# Altium PCB DaughterBoards.PcbDoc (part 4 of 4)
Units mil, origin at the board's own origin, x right, y up, seen from the top; angles counter-clockwise.
Board outline 8080.87 x 6506.06 mil, 4 copper layers (Top Layer, Top, Mid-Layer 1, GND, Mid-Layer 2, VCC, Bottom Layer, Bottom), stack 18.2 mil thick; 508 components, 296 nets, 1635 pads, 376 vias.
Unrouted connection lines stored in the file: 28.
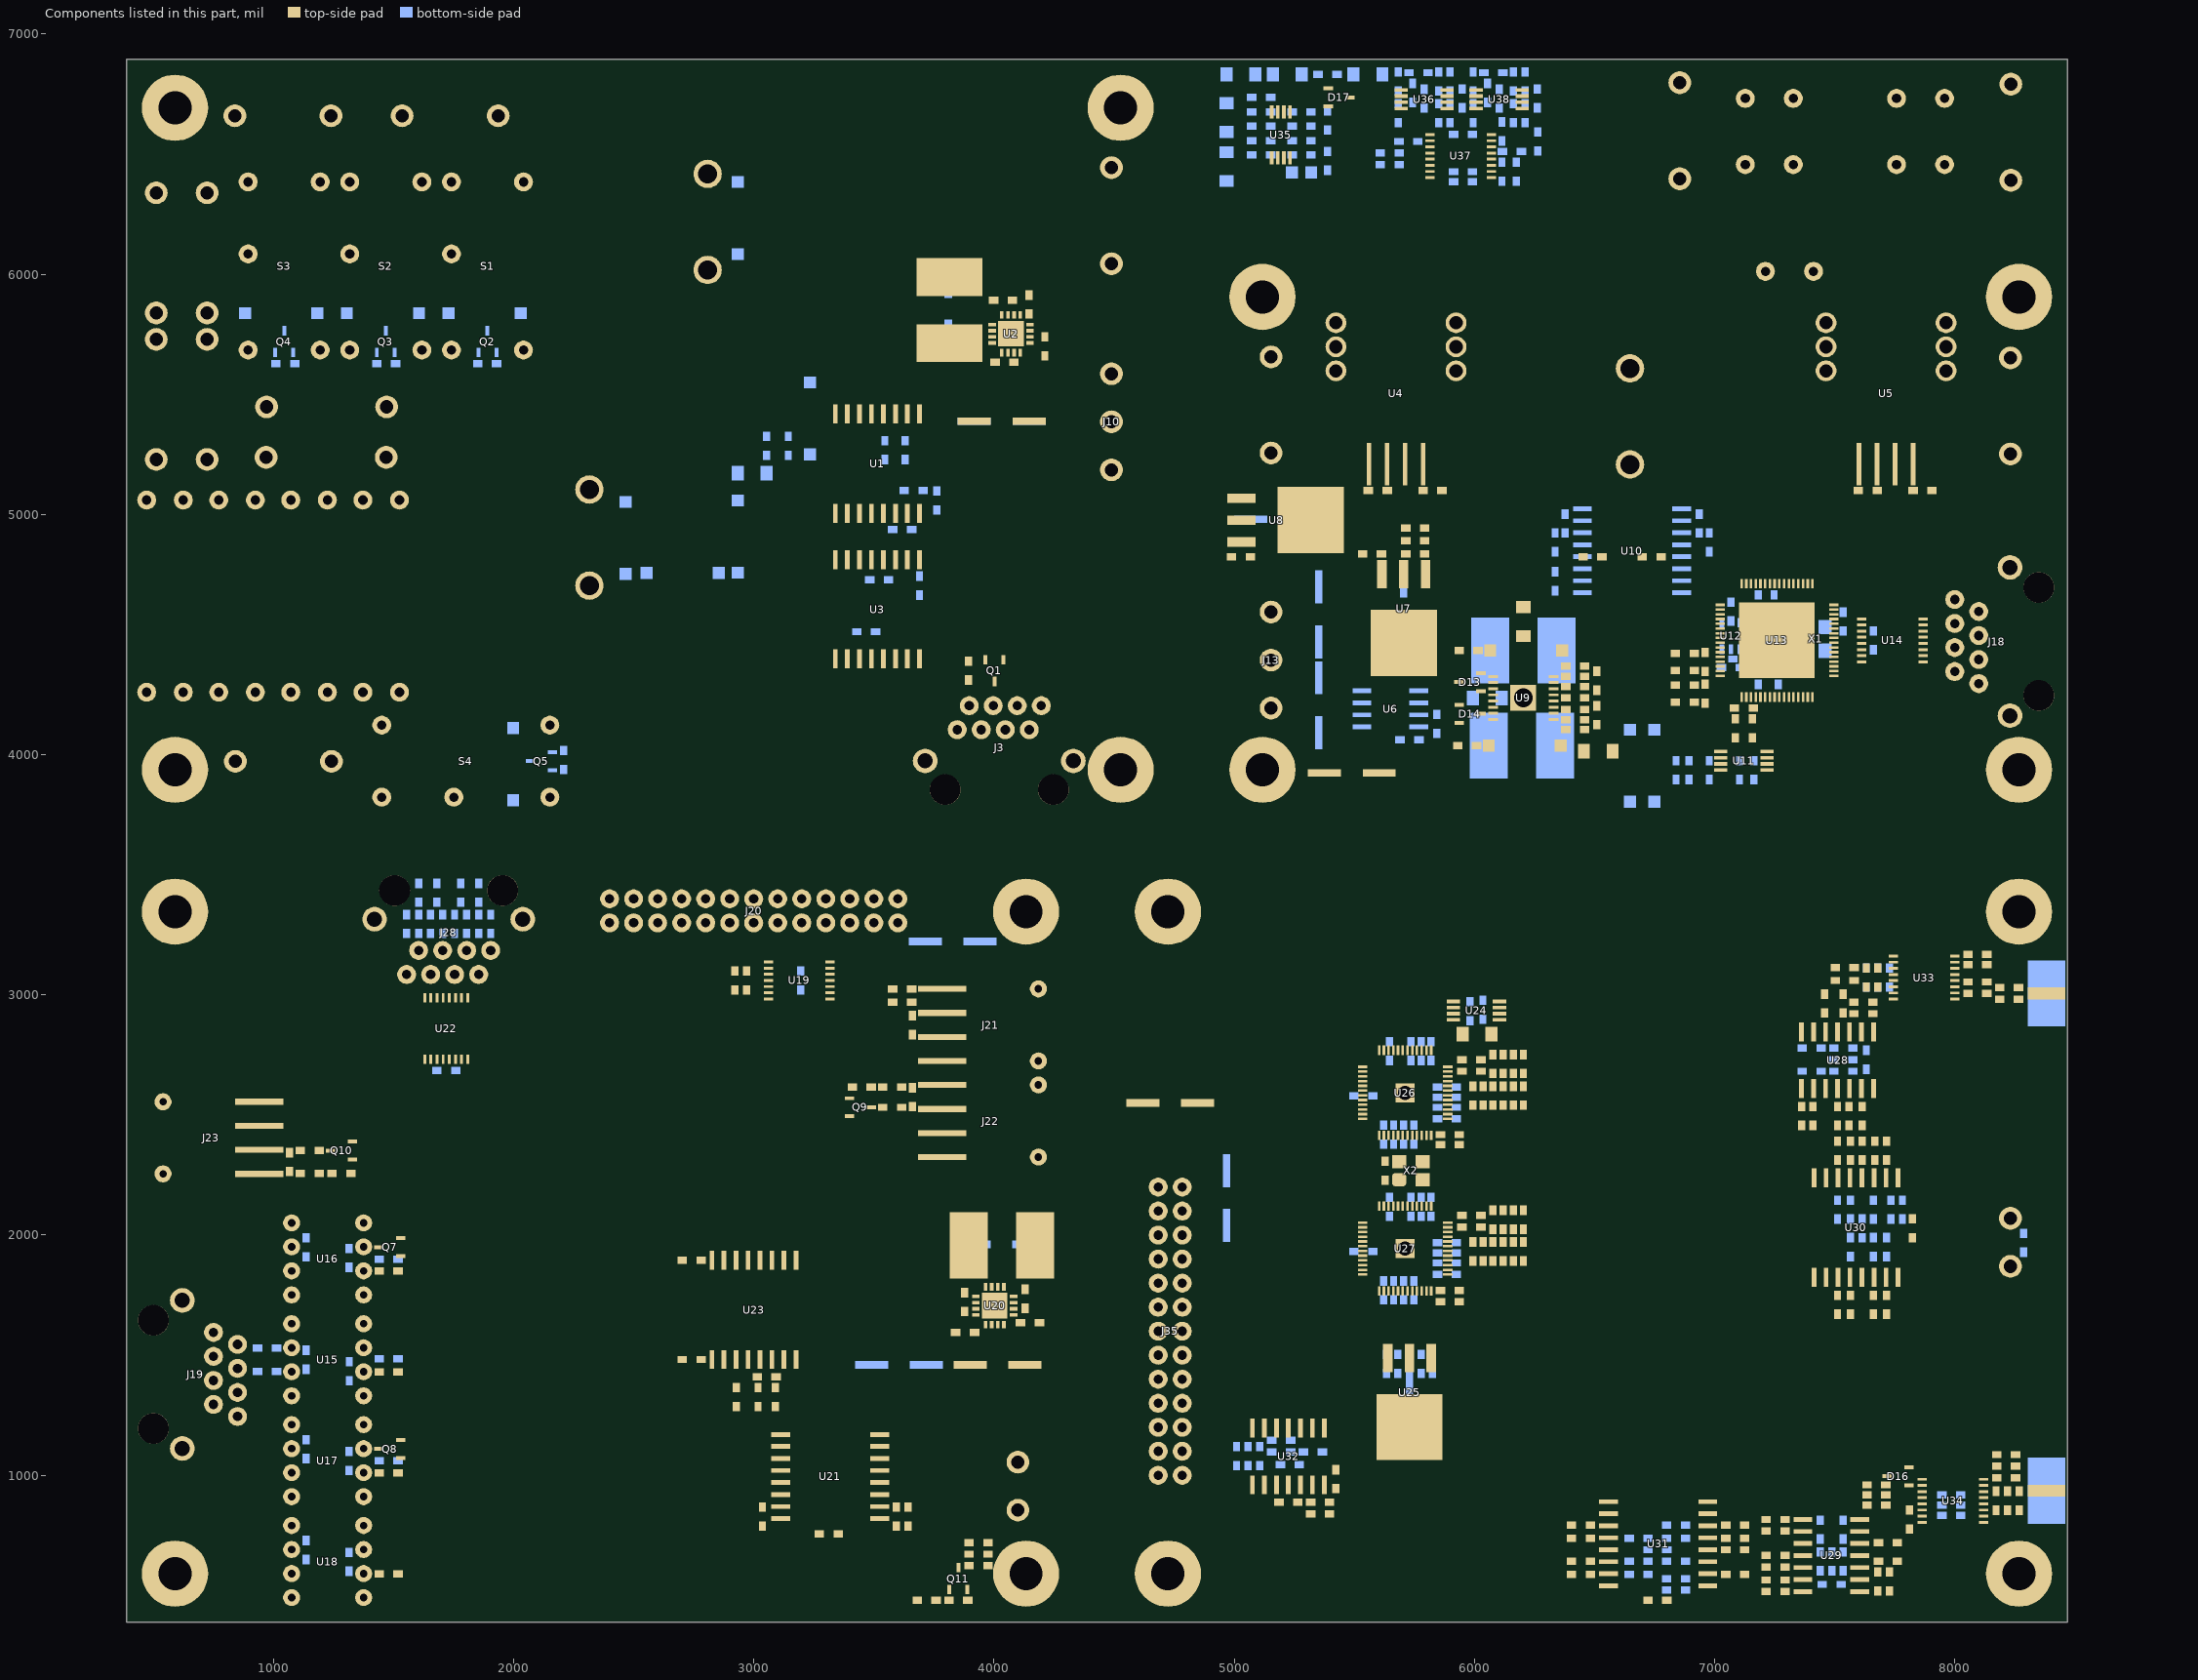
[diagram p6: the components of this part, seen from the top]

## Silkscreen, mask and mechanical layers (free items; w line width, h text height)
Top Overlay, Top Silk:
  lines w7.87: 6486,4236 6540,4236
  text "N" at 864,6882 h36.91 r180
  text "C" at 1260,6882 h36.91 r180
  text "B" at 1554,6882 h36.91 r180
  text "A" at 1956,6882 h36.91 r180
  text "In" at 6636,6822 h36.91 r270
  text "Out" at 8454,6744 h36.91 r90
  text "In" at 6636,6420 h36.91 r270
  text "Neutral" at 4710,6336 h36.91 r90
  text "GND" at 8454,6330 h36.91 r90
  text "Live Out" at 4710,5946 h36.91 r90
  text "Inductor" at 4932,5766 h36.91 r270
  text "Load" at 8454,5580 h36.91 r90
  text "12V" at 4711.15,5526 h36.91 r90
  text "GND" at 4711.15,5328 h36.91 r90
  text "GND" at 4932,5316 h36.91 r270
  text "GND" at 8454,5196 h36.91 r90
  text "-12V" at 4711.15,5106 h36.91 r90
  text "12V" at 4932,4650 h36.91 r270
  text "GND" at 4932,4452 h36.91 r270
  text "-12V" at 4932,4278 h36.91 r270
  text "GND" at 780,3750 h36.91
  text "565V" at 1170,3750 h36.91
  text "10V" at 8454,2016 h36.91 r90
  text "GND" at 8454,1812 h36.91 r90
  text "GND" at 4320,1000 h36.91 r90
  text "Ref" at 4320,805 h36.91 r90

## Text inside footprints (layer, text, board x,y; h text height)
C4: Bottom Overlay, Bot Silk "-" at 3911.92,5372.25 h36.91 r180; Bottom Overlay, Bot Silk "+" at 4106.8,5372.25 h36.91 r180
C5: Top Overlay, Top Silk "-" at 4152.08,5372.25 h36.91 r180; Top Overlay, Top Silk "+" at 3957.2,5372.25 h36.91 r180
C14: Bottom Overlay, Bot Silk "-" at 3825.75,5735.92 h36.91 r270; Bottom Overlay, Bot Silk "+" at 3825.75,5930.8 h36.91 r270
C22: Bottom Overlay, Bot Silk "-" at 5367.75,4463.92 h36.91 r270; Bottom Overlay, Bot Silk "+" at 5367.75,4658.8 h36.91 r270
C23: Bottom Overlay, Bot Silk "-" at 5367.75,4085.92 h36.91 r270; Bottom Overlay, Bot Silk "+" at 5367.75,4280.8 h36.91 r270
C25: Bottom Overlay, Bot Silk "-" at 5690.25,4728.08 h36.91 r90; Bottom Overlay, Bot Silk "+" at 5690.25,4533.2 h36.91 r90
C28: Top Overlay, Top Silk "-" at 5610.08,3908.25 h36.91 r180; Top Overlay, Top Silk "+" at 5415.2,3908.25 h36.91 r180
C29: Bottom Overlay, Bot Silk "-" at 5063.92,4964.25 h36.91 r180; Bottom Overlay, Bot Silk "+" at 5258.8,4964.25 h36.91 r180
C61: Bottom Overlay, Bot Silk "-" at 3484.92,1444.25 h36.91 r180; Bottom Overlay, Bot Silk "+" at 3679.8,1444.25 h36.91 r180
C62: Bottom Overlay, Bot Silk "-" at 3948.08,3237.75 h36.91; Bottom Overlay, Bot Silk "+" at 3753.2,3237.75 h36.91
C64: Top Overlay, Top Silk "-" at 4135.08,1444.25 h36.91 r180; Top Overlay, Top Silk "+" at 3940.2,1444.25 h36.91 r180
C71: Bottom Overlay, Bot Silk "-" at 3910.92,1945.25 h36.91 r180; Bottom Overlay, Bot Silk "+" at 4105.8,1945.25 h36.91 r180
C87: Bottom Overlay, Bot Silk "-" at 5714.25,1386.08 h36.91 r90; Bottom Overlay, Bot Silk "+" at 5714.25,1191.2 h36.91 r90
C160: Top Overlay, Top Silk "-" at 4613.92,2565.75 h36.91; Top Overlay, Top Silk "+" at 4808.8,2565.75 h36.91
C165: Bottom Overlay, Bot Silk "-" at 4952.25,2274.08 h36.91 r90; Bottom Overlay, Bot Silk "+" at 4952.25,2079.2 h36.91 r90
J20: Top Overlay, Top Silk "1" at 3675,3500 h62.5 r270
J35: Top Overlay, Top Silk "1" at 4583.86,2275 h62.5